# Altium PCB PBC-full.PcbDoc
Units mm, origin at the board's own origin, x right, y up, seen from the top; angles counter-clockwise.
Board outline 80.01 x 65.41 mm, 2 copper layers (Top Layer, Bottom Layer); 75 components, 86 nets, 316 pads, 108 vias.
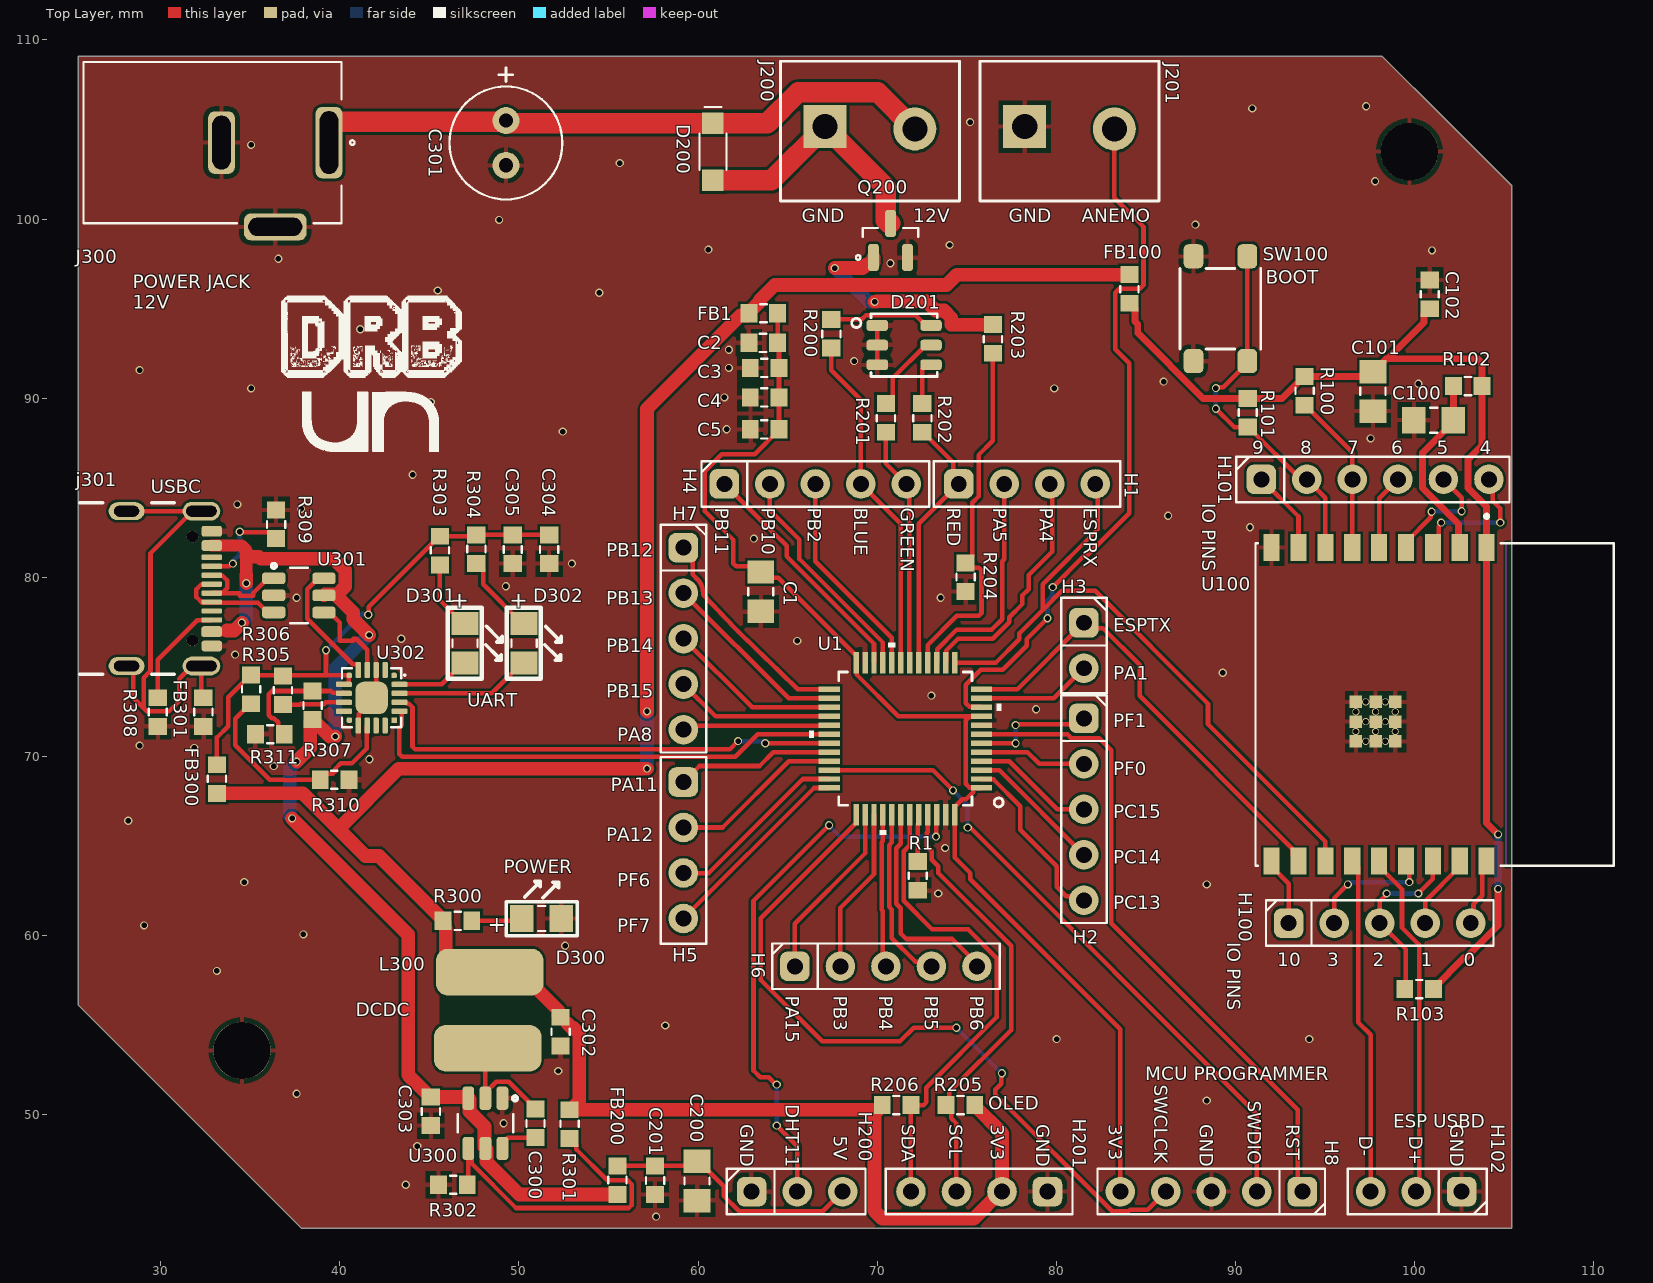
[diagram p0: Top Layer view]
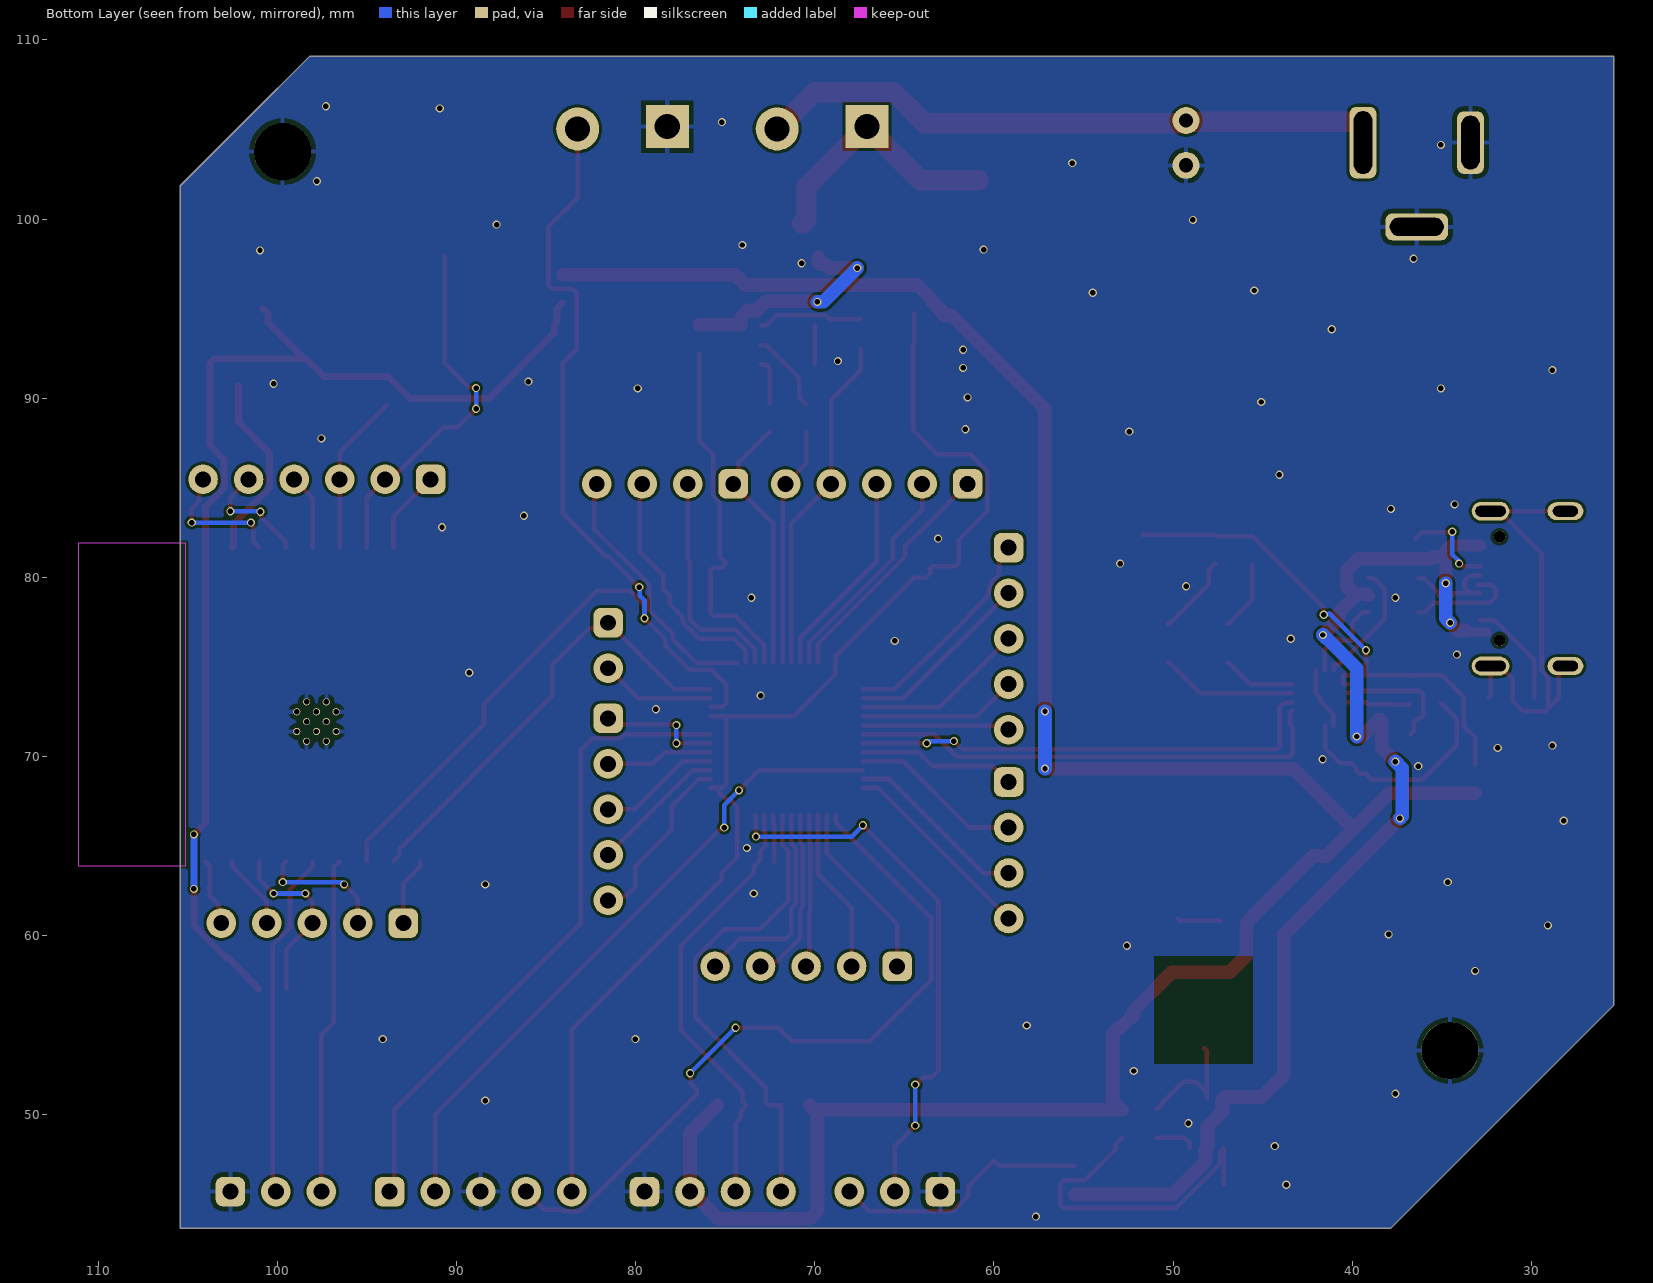
[diagram p1: Bottom Layer view, seen from below]
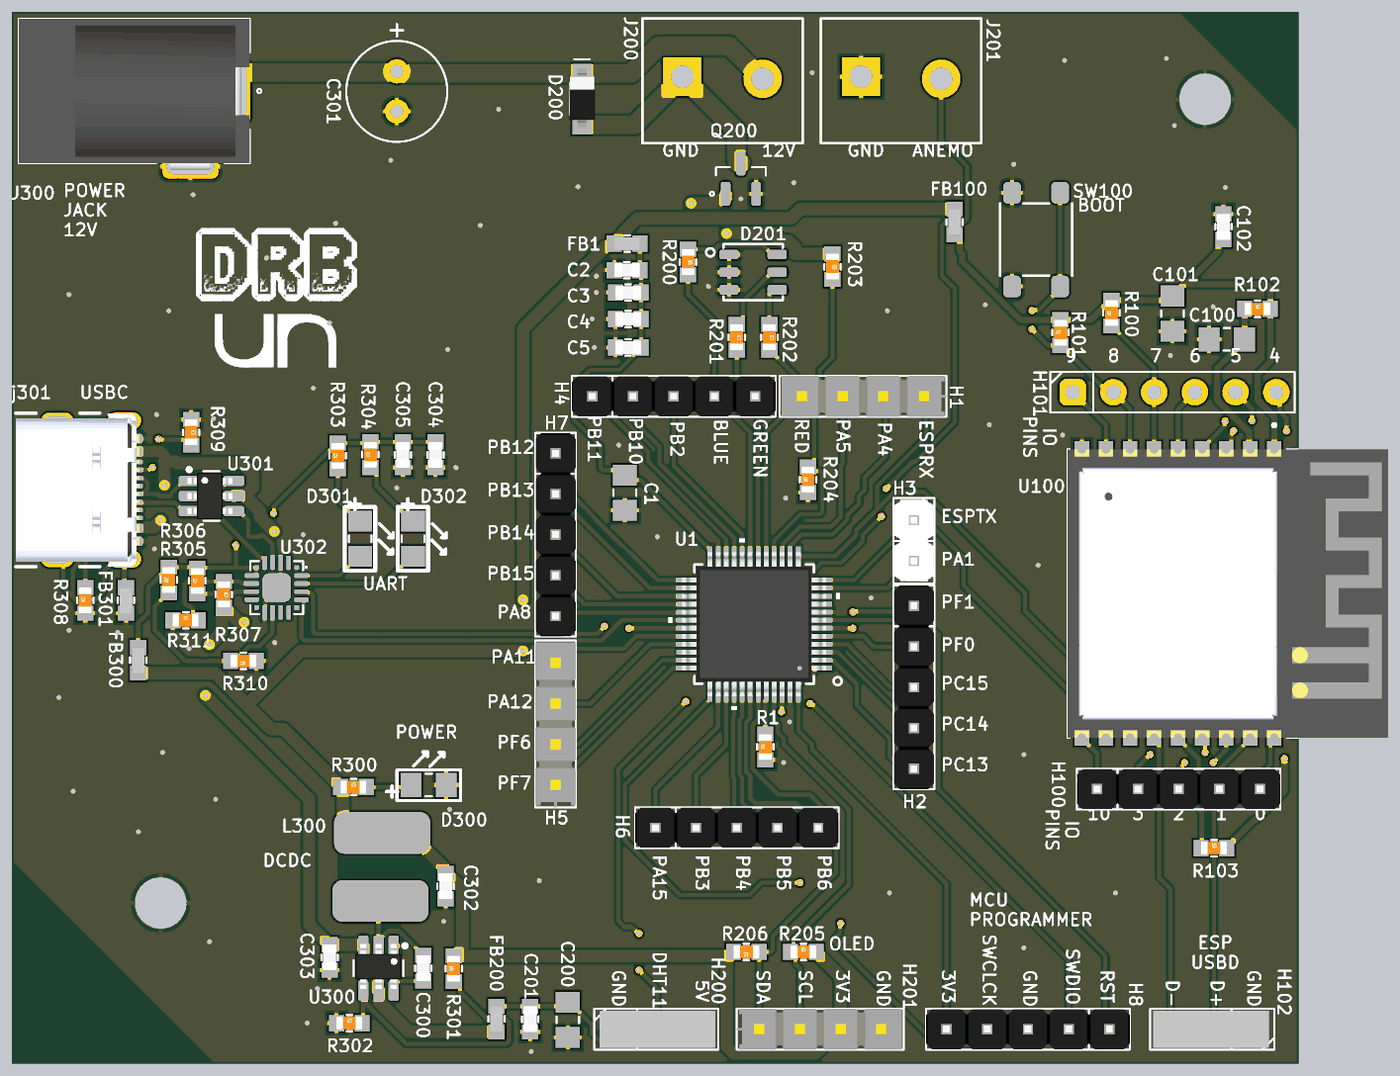
[diagram p2: 3D render of the assembled board from above, using the file's embedded part models]

## Layer stack, top to bottom
Top Solder: solder mask 0.0102, Solder Resist, Dk 3.5
Top Layer: signal copper 0.0356
Dielectric 1: dielectric 0.32, FR-4, Dk 4.8
Bottom Layer: signal copper 0.0356
Bottom Solder: solder mask 0.0102, Solder Resist, Dk 3.5

## Board outline
37.846,43.688 25.4,56.134 25.4,109.093 98.171,109.093 101.727,105.537 105.41,101.854 105.41,43.688

## Design rules (kind name [scope] priority, off if disabled: settings)
Clearance [All] p1: gap=0.152 ignorepadtopadclearanceinfootprint=FALSE
DiffPairsRouting DiffPairsRouting_USB [InDifferentialPairClass('USB_2.0_MCU') and InDifferentialPairClass('USB_2.0_ESP')] p1: maxlimit=0.152 minlimit=0.152 mostfreqgap=0.152 toplayer_minwidth=0.279 toplayer_maxwidth=0.787 toplayer_prefwidth=0.787 bottomlayer_minwidth=0.279 bottomlayer_maxwidth=0.787 bottomlayer_prefwidth=0.787 maxuncoupledlength=12.7
HoleSize [All] p1: absolutevalues=TRUE maxlimit=25.4 minlimit=0.254 maxpercent=80.000 minpercent=20.000
MatchedLengths [InDifferentialPairClass('USB_2.0_MCU') and InDifferentialPairClass('USB_2.0_ESP')] p1: tolerance=1.27 checknetsindiffpair=TRUE checkdiffpairvsdiffpair=FALSE checkxsignals=FALSE checkothers=FALSE
MinimumSolderMaskSliver [All] p1: minsoldermaskwidth=0.102
PolygonConnect PolygonConnect_via [IsVia] p1: connectstyle=Direct reliefconductorwidth=0.254 reliefentries=4 polygonreliefangle="90 Angle" airgapwidth=0.254
PolygonConnect [All] p2: connectstyle=Relief reliefconductorwidth=0.254 reliefentries=4 polygonreliefangle="90 Angle" airgapwidth=0.254
RoutingVias [All] p1: holewidth=0.305 width=0.457 viastyle="Through Hole" minholewidth=0.305 minwidth=0.457 maxholewidth=25.4 maxwidth=25.4
SilkToSilkClearance [All] p1: silktosilkclearance=0.025
SilkToSolderMaskClearance [IsPad] p1: minsilkscreentomaskgap=0.025 clearancetoexposedcopper=TRUE
SolderMaskExpansion [All] p1: expansion=0.102 istentingtop=FALSE
SupplyNets "Schematic Supply Nets_6" [InNet('3V3_ESP32')] p1: voltage=0.000
SupplyNets "Schematic Supply Nets_5" [InNet('3V3_CP')] p2: voltage=0.000
SupplyNets "Schematic Supply Nets_4" [InNet('VUSB')] p3: voltage=0.000
SupplyNets "Schematic Supply Nets_3" [InNet('3V3_MCU')] p4: voltage=0.000
SupplyNets "Schematic Supply Nets_2" [InNet('3V3')] p5: voltage=0.000
SupplyNets "Schematic Supply Nets_1" [InNet('GND')] p6: voltage=0.000
SupplyNets "Schematic Supply Nets" [InNet('12V')] p7: voltage=0.000
Width Width_2A [InNetClass('12V_2A')] p1: maxlimit=1.143 minlimit=0.254 preferedwidth=1.143
Width Width_1A [InNetClass('5V_1A')] p2: maxlimit=0.762 minlimit=0.254 preferedwidth=0.762
Width Width_3V3_1A [InNet('3V3')] p3: maxlimit=0.762 minlimit=0.254 preferedwidth=0.762
Width Width_0.5A [InNet('3V3_ESP32')] p4: maxlimit=0.508 minlimit=0.381 preferedwidth=0.508
Width [All] p5: maxlimit=1.524 minlimit=0.152 preferedwidth=0.254
25 further rules are at their usual default settings.

## Classes and differential pairs
component class 300: C300 C301 C302 C303 C304 C305 D300 D301 D302 FB300 FB301 J300 j301 L300 R300 R301 R302 R303 R304 R305 R306 R307 R308 R309 R310 R311 U300 U301 U302
component class 100: C100 C101 C102 FB100 H100 H101 H102 R100 R101 R102 R103 SW100 U100
component class 000: C1 C2 C3 C4 C5 FB1 H1 H2 H3 H4 H5 H6 H7 H8 R1 U1
differential pair class USB_2.0_MCU: DATA USB_D
differential pair class USB_2.0_ESP: ESP_USBD
net class 12V_2A: 12V NetD200_2
net class 5V_1A: 3V3 NetC300_1 NetC300_2 VUSB
component class 200: C200 C201 D200 D201 FB200 H200 H201 J200 J201 Q200 R200 R201 R202 R203 R204 R205 R206 SDA
differential pair USB_D: +USB_D_P -USB_D_N
differential pair ESP_USBD: +ESP_USBD_P -ESP_USBD_N
differential pair DATA: +DATA_P -DATA_N

## Components (designator, comment, footprint, x,y, rotation, side; value= is the part's Value field where it differs from the comment)
C1 "10uF 25V" 0805_cap 63.5,79.205 r270 top value=10uF
C2 "0.1uF 50V" 0603_cap 63.64,93.091 r180 top value=0.1uF
C3 "0.1uF 50V" 0603_cap 63.716,91.694 r180 top value=0.1uF
C4 "0.1uF 50V" 0603_cap 63.716,90.043 r180 top value=0.1uF
C5 "0.1uF 50V" 0603_cap 63.716,88.265 r180 top value=0.1uF
C100 "10uF 25V" 0805_cap 101.049,88.773 r180 top value=10uF
C101 "10uF 25V" 0805_cap 97.663,90.381 r270 top value=10uF
C102 "0.1uF 50V" 0603_cap 100.838,95.796 r90 top value=0.1uF
C200 "10uF 25V" 0805_cap 59.944,46.312 r270 top value=10uF
C201 "0.1uF 50V" 0603_cap 57.6,46.355 r270 top value=0.1uF
C300 "0.1uF 50V" 0603_cap 50.927,49.53 r270 top value=0.1uF
C301 "100uF 35V" CAP_TH_2.5MM_6.3*12MM 49.276,104.247 r270 top value=100uF
C302 "22uF 10V" 0603_cap 52.324,54.648 r270 top value=22uF
C303 "10uF 10V" 0603_cap 45.085,50.203 r270 top value=10uF
C304 "10uF 10V" 0603_cap 51.689,81.572 r270 top value=10uF
C305 "0.1uF 50V" 0603_cap 49.657,81.572 r270 top value=0.1uF
D200 "40V 1A" SOD_123 60.833,103.759 r270 top
D201 "RGB" RGB_NS_3.5X3.7 71.501,92.964 r0 top
D300 "2.9V" 0805_LED 51.265,60.96 r0 top
D301 "2.9V" 0805_LED 46.99,76.327 r270 top
D302 "2V" 0805_LED 50.292,76.327 r270 top
FB1 "60OHM 2A" 0603_fb 63.64,94.742 r0 top value="60 OHM"
FB100 "60OHM 2A" 0603_fb 84.074,96.101 r270 top value="60 OHM"
FB200 "60OHM 2A" 0603_fb 55.499,46.355 r90 top value="60 OHM"
FB300 "60OHM 2A" 0603_fb 33.147,68.745 r90 top value="60 OHM"
FB301 "60OHM 2A" 0603_fb 32.385,72.479 r90 top value="60 OHM"
H1 "4x1" H_4x1_TH_2.54mm 78.359,85.217 r0 top
H2 "5x1" H_5x1_TH_100mil 81.534,67.056 r270 top
H3 "2x1" H_2x1_TH_100mil 81.534,76.2 r270 top
H4 "5x1" H_5x1_TH_100mil 66.548,85.217 r0 top
H5 "4x1" H_4x1_TH_2.54mm 59.182,64.77 r270 top
H6 "5x1" H_5x1_TH_100mil 70.485,58.293 r0 top
H7 "5x1" H_5x1_TH_100mil 59.182,76.581 r270 top
H8 "5x1" H_5x1_TH_100mil 88.646,45.72 r180 top
H100 "5x1" H_5x1_TH_100mil 98.044,60.706 r0 top
H101 "6x1" H_6x1_TH_100mil 97.79,85.471 r0 top
H102 "3x1" H_3X1_TH_100mil 100.076,45.72 r180 top
H200 "3x1" H_3X1_TH_100mil 65.532,45.72 r0 top
H201 "4x1" H_4x1_TH_2.54mm 75.692,45.72 r180 top
J200 "Connector 2pos" CON_2x1_TH_5MM 69.596,104.902 r0 top
J201 "Connector 2pos" CON_2x1_TH_5MM 80.732,104.902 r0 top
J300 "PWR JACK 2.1mm" CON_POWER_BARREL_2.1MM_3CONN 36.401,104.267 r270 top
j301 "USB C" CON_USB_C_16P_RA 30.48,79.375 r270 top
L300 "2.2uH 4A" Ind_5.8*5.2_NS 48.313,55.846 r90 top value=2.2uH
Q200 "N CH" SOT_23_3 70.739,98.806 r90 top
R1 "10k 1/10W" 0603_res 72.263,63.335 r90 top value=10k
R100 "1k 1/10W" 0603_res 93.853,90.411 r90 top value=1k
R101 "1k 1/10W" 0603_res 90.678,89.192 r90 top value=1k
R102 "1k 1/10W" 0603_res 102.959,90.678 r0 top value=1k
R103 "1k 1/10W" 0603_res 100.241,57.023 r0 top value=1k
R200 "100R 1/10W" 0603_res 67.437,93.599 r270 top value=100R
R201 "100R 1/10W" 0603_res 70.485,88.9 r270 top value=100R
R202 "100R 1/10W" 0603_res 72.517,88.9 r270 top value=100R
R203 "10k 1/10W" 0603_res 76.454,93.307 r270 top value=10k
R204 "10k 1/10W" 0603_res 74.93,80.01 r90 top value=10k
R205 "10k 1/10W" 0603_res 74.638,50.546 r0 top value=10k
R206 "10k 1/10W" 0603_res 71.082,50.546 r180 top value=10k
R300 "84R5 1/10W" 0603_res 46.571,60.833 r0 top value=84R5
R301 "33k2 1/10W" 0603_res 52.832,49.492 r90 top value=33k2
R302 "10k 1/10W" 0603_res 46.317,46.101 r0 top value=10k
R303 "84R5 1/10W" 0603_res 45.593,81.496 r90 top value=84R5
R304 "150R 1/10W" 0603_res 47.625,81.572 r90 top value=150R
R305 "1k 1/10W" 0603_res 36.83,73.698 r90 top value=1k
R306 "10k 1/10W" 0603_res 35.052,73.749 r90 top value=10k
R307 "33k2 1/10W" 0603_res 38.481,72.86 r270 top value=33k2
R308 "4k7 1/10W" 0603_res 29.845,72.479 r90 top value=4k7
R309 "4k7 1/10W" 0603_res 36.449,82.969 r270 top value=4k7
R310 "10k 1/10W" 0603_res 39.713,68.707 r180 top value=10k
R311 "54k9 1/10W" 0603_res 36.106,71.247 r0 top value=54k9
SW100 "Sw" Sw_PUSH_4.5x4.5x5mm 89.154,94.996 r90 top
U1 "STM32F030C8T6TR" LQFP48_7x7mm 71.569,70.997 r180 top
U100 "ESP32-C3-WROOM-02-N4" ESP32-C3-WROOM-02-N4 98.013,72.911 r270 top
U300 "TPS564201DDCR" SOT_23_6 48.133,49.53 r270 top
U301 "USBLC6-2SC6" SOT_23_6 37.719,78.994 r0 top
U302 "CP2102N-A02-GQFN20R" WFQFN_20_EP_3X3MM 41.783,73.279 r270 top

## Footprints (in the part's own frame and the unit in brackets; to place one, negate y for a bottom-side part, rotate by r counter-clockwise, add the part's x,y. Pads: shape width x height; smd on the part's side, far side on the other; paste and mask are expansions set on the pad)
0603_cap [mil]
  rect 37x40 smd: 1(-31.5,0) 2(31.5,0)
  silkscreen extent -7,-20 8,20, body extent -31,-17 31,17, height 34
0603_fb [mil]
  rect 37x40 smd: 1(-31.5,0) 2(31.5,0)
  silkscreen extent -6,-20 8,20, body extent -32,-16 31,16, height 32
0603_res [mil] "1608 Metric / 20190225 / C-A.Serna.A"
  rect 37x40 smd: 1(-31.5,0) 2(31.5,0)
  silkscreen extent -7,-20 8,20, body extent -31,-16 32,16, height 12
0805_cap [mm]
  rect 1.3x1.5 smd: 1(-1.1,0) 2(1.1,0)
  silkscreen extent -0.2,-0.7 0.2,0.7, body extent -1.13,-0.7 1.07,0.7, height 1
0805_LED [mm]
  rect 1.3x1.5 smd: 1(-1.1,0) 2(1.1,0)
  silkscreen extent -1.98,-0.97 1.98,2.07, body extent -1,-0.62 1,0.63, height 1.1
CAP_TH_2.5MM_6.3*12MM [mm]
  round 1.5 hole 0.8: 1(-1.25,0) 2(1.25,0)
  silkscreen extent -4.19,-3.15 3.15,3.15, body extent -3.15,-3.15 3.15,3.15, height 12
CON_2x1_TH_5MM [mm]
  rect 2.4x2.4 hole 1.4: 1(-2.5,0.254)
  round 2.4 hole 1.4: 2(2.5,0.127)
  silkscreen extent -5,-3.9 5,3.9, body extent -5,-3.9 5,3.9, height 10.2
CON_POWER_BARREL_2.1MM_3CONN [mm]
  rrect50% 4x1.5 hole 1.016 slot 3.5 at 0 deg: 1(0,3)
  rrect50% 3.5x1.5 hole 1.016 slot 3 at 0 deg: 2(0,-3)
  rrect50% 1.5x3.5 hole 1.016 slot 3 at 90 deg: 3(4.7,0)
  silkscreen extent -4.5,-10.7 4.5,4.43, body extent -4.5,-10.7 4.9,3.7, height 11
CON_USB_C_16P_RA [mm]
  oval 1.05x2.1 hole 0.6 slot 1.7 at 90 deg: 0(-4.32,1.803) 0(4.32,1.803)
  oval 1x2 hole 0.6 slot 1.4 at 90 deg: 0(-4.32,-2.377) 0(4.32,-2.377)
  rrect50% 0.6x1.15 smd mask+0.046: A1/B12(-3.2,2.378) A4/B9(-2.4,2.378) B1/A12(3.2,2.378) B4/A9(2.4,2.378)
  rrect50% 0.3x1.15 smd mask+0.046: A5(-1.25,2.378) A6(-0.25,2.378) A7(0.25,2.378) A8(1.25,2.378) B5(1.75,2.378) B6(0.75,2.378) B7(-0.75,2.378) B8(-1.75,2.378)
  round 0.65 hole 0.65 unplated mask+0.046: ""(-2.89,1.303) ""(2.89,1.303)
  silkscreen extent -4.79,-4.98 4.79,0.27, body extent -4.79,-4.98 4.79,2.73, height 3.31
ESP32-C3-WROOM-02-N4 [mm]
  rect 1.5x0.9 smd: 1(-8.75,6) 2(-8.75,4.5) 3(-8.75,3) 4(-8.75,1.5) 5(-8.75,0) 6(-8.75,-1.5) 7(-8.75,-3) 8(-8.75,-4.5) 9(-8.75,-6) 10(8.75,-6) 11(8.75,-4.5) 12(8.75,-3) 13(8.75,-1.5) 14(8.75,0) 15(8.75,1.5) 16(8.75,3) 17(8.75,4.5) 18(8.75,6)
  rect 0.7x0.7 smd: 19(-0.14,0.9) 19(-0.14,-0.2) 19(-0.14,-1.3) 19(0.96,0.9) 19(0.96,-0.2) 19(0.96,-1.3) 19(2.06,-0.2) 19(2.06,0.9) 19(2.06,-1.3)
  round 0.4 hole 0.3 mask+0: 19(-0.14,0.35) 19(-0.14,-0.75) 19(0.41,0.9) 19(0.41,-0.2) 19(0.41,-1.3) 19(0.96,0.35) 19(0.96,-0.75) 19(1.51,0.9) 19(1.51,-0.2) 19(1.51,-1.3) 19(2.06,-0.75) 19(2.06,0.35)
  Keep-Out Layer region: 9,7.1 -9,7.1 -9,13.1 9,13.1
  Keep-Out Layer region: 9,7.1 -9,7.1 -9,13.1 9,13.1
  silkscreen extent -10.6,-6.9 9,13.1, body extent -9,-6.9 9,13.1, height 3.35
H_2x1_TH_100mil [mil]
  rrect50% 65x65 hole 35: 1(-50,0)
  round 65 hole 35: 2(50,0)
  silkscreen extent -105,-50 105,50, body extent -101,-49 99,49, height 339
H_3X1_TH_100mil [mil]
  rrect50% 65x65 hole 35: 1(-100,0)
  round 65 hole 35: 2(0,0) 3(100,0)
  silkscreen extent -155,-50 150,50, body extent -142,-46 142,46, height 320
H_4x1_TH_2.54mm [mil]
  rrect50% 65x65 hole 35: 1(-150,0)
  round 65 hole 35: 2(-50,0) 3(50,0) 4(150,0)
  silkscreen extent -205,-50 205,50, body extent -200,-50 205,50, height 420
H_5x1_TH_100mil [mil]
  rrect50% 65x65 hole 35: 1(-200,0)
  round 65 hole 35: 2(-100,0) 3(0,0) 4(100,0) 5(200,0)
  silkscreen extent -250,-50 250,50, body extent -250,-49 250,49, height 335
H_6x1_TH_100mil [mil]
  rrect50% 65x65 hole 35: 1(-250,0)
  round 65 hole 35: 2(-150,0) 3(-50,0) 4(50,0) 5(150,0) 6(250,0)
  silkscreen extent -305,-50 295,50
Ind_5.8*5.2_NS [mm]
  rrect50% 2.6x6 smd: 1(-2.125,0.053) 2(2.125,-0.053)
  body extent -3,-2.75 3,2.75, height 4.5
LQFP48_7x7mm [mm]
  rect 1.194x0.305 smd paste+0 mask+0.046: 1(-4.25,2.75) 2(-4.25,2.25) 3(-4.25,1.75) 4(-4.25,1.25) 5(-4.25,0.75) 6(-4.25,0.25) 7(-4.25,-0.25) 8(-4.25,-0.75) 9(-4.25,-1.25) 10(-4.25,-1.75) 11(-4.25,-2.25) 12(-4.25,-2.75) 25(4.25,-2.75) 26(4.25,-2.25) 27(4.25,-1.75) 28(4.25,-1.25) 29(4.25,-0.75) 30(4.25,-0.25) 31(4.25,0.25) 32(4.25,0.75) 33(4.25,1.25) 34(4.25,1.75) 35(4.25,2.25) 36(4.25,2.75)
  rect 0.305x1.194 smd paste+0 mask+0.046: 13(-2.75,-4.25) 14(-2.25,-4.25) 15(-1.75,-4.25) 16(-1.25,-4.25) 17(-0.75,-4.25) 18(-0.25,-4.25) 19(0.25,-4.25) 20(0.75,-4.25) 21(1.25,-4.25) 22(1.75,-4.25) 23(2.25,-4.25) 24(2.75,-4.25) 37(2.75,4.25) 38(2.25,4.25) 39(1.75,4.25) 40(1.25,4.25) 41(0.75,4.25) 42(0.25,4.25) 43(-0.25,4.25) 44(-0.75,4.25) 45(-1.25,4.25) 46(-1.75,4.25) 47(-2.25,4.25) 48(-2.75,4.25)
  silkscreen extent -5.46,-5.35 5.35,5.35, body extent -4.5,-4.5 4.5,4.5, height 1.6
RGB_NS_3.5X3.7 [mm]
  rrect50% 1.2x0.6 smd: 1(-1.5,1.1) 2(-1.5,0) 3(-1.5,-1.1) 4(1.5,-1.1) 5(1.5,0) 6(1.5,1.1)
  silkscreen extent -2.92,-1.75 1.85,1.75, body extent -1.85,-1.74 1.85,1.75, height 1
SOD_123 [mm]
  rect 1.2x1.2 smd: 1(-1.6,0) 2(1.6,0)
  silkscreen extent -2.5,-0.75 1,0.75, body extent -1.93,-0.8 1.77,0.8, height 1.28
SOT_23_3 [mm]
  rrect50% 1.5x0.6 smd: 1(-0.95,0.95) 2(-0.95,-0.95) 3(0.95,0)
  silkscreen extent -1.07,-1.55 0.7,1.92, body extent -0.7,-1.52 0.7,1.53, height 1.12
SOT_23_6 [mm]
  rrect50% 1.3x0.65 smd mask+0.064: 1(-1.4,0.95) 2(-1.4,0) 3(-1.4,-0.95) 4(1.4,-0.95) 5(1.4,0) 6(1.4,0.95)
  silkscreen extent -1.52,-1.55 0.5,1.78, body extent -1.5,-1.45 1.3,1.45, height 1.45
Sw_PUSH_4.5x4.5x5mm [mm]
  rrect50% 1.35x1.1 smd: 1(-2.925,1.5) 1(2.925,1.5) 2(-2.925,-1.5) 2(2.925,-1.5)
  silkscreen extent -2.25,-2.25 2.25,2.25, body extent -2.25,-2.25 2.25,2.25, height 5
WFQFN_20_EP_3X3MM [mm]
  rrect50% 0.3x0.3 smd mask+0.046: 1(-1.25,1.25) 6(-1.25,-1.25) 11(1.25,-1.25)
  rrect50% 0.9x0.3 smd mask+0.046: 2(-1.55,0.75) 3(-1.55,0.25) 4(-1.55,-0.25) 5(-1.55,-0.75) 12(1.55,-0.75) 13(1.55,-0.25) 14(1.55,0.25) 15(1.55,0.75)
  rrect50% 0.3x0.9 smd mask+0.046: 7(-0.75,-1.55) 8(-0.25,-1.55) 9(0.25,-1.55) 10(0.75,-1.55) 17(0.75,1.55) 18(0.25,1.55) 19(-0.25,1.55) 20(-0.75,1.55)
  rect 0.3x0.3 smd mask+0.046: 16(1.25,1.25)
  rrect50% 1.8x1.8 smd mask+0.046: 21(0,0)
  silkscreen extent -1.65,-1.65 1.65,1.9, body extent -1.5,-1.5 1.5,1.5, height 0.8

## Part data
C1 C100 C101 C200: library part Cap_10uF_0805_25V_, "25V 10uF X5R ±10% 0805 Multilayer Ceramic Capacitors MLCC - SMD/SMT ROHS", Manufacturer="Samsung Electro-Mechanics", Manufacturer Part Number=CL21A106KAYNNNE, Supplier Part Number 1=C15850, ComponentLink1Description=LCSC, ComponentLink1URL=https://lcsc.com/product-detail/Multilayer-Ceramic-Capacitors-MLCC-SMD-SMT_Samsung-Electro-Mechanics-CL21A106KAYNNNE_C15850.html, Supplier 1=LCSC
C2 C3 C4 C5 C102 C201 C300 C305: library part Cap_0.1uF_0603_50V, "50V 100nF Y5V -20%~+80% 0603 Multilayer Ceramic Capacitors MLCC - SMD/SMT ROHS", Manufacturer="Walsin Tech Corp", Manufacturer Part Number=0603F104Z500CT, Supplier Part Number 1=C83060, ComponentLink1Description=LCSC, ComponentLink1URL=https://www.lcsc.com/product-detail/Multilayer-Ceramic-Capacitors-MLCC-SMD-SMT_Walsin-Tech-Corp-0603F104Z500CT_C83060.html, Supplier 1=LCSC
C301: library part Cap_100uF_ALU_TH_35V, "100uF 35V ±20% Plugin,D6.3xL12mm Aluminum Electrolytic Capacitors - Leaded ROHS", Manufacturer=HRK, Manufacturer Part Number="35V100uF CD110", Supplier Part Number 1=C2960381, ComponentLink1Description=LCSC, ComponentLink1URL=https://lcsc.com/product-detail/Aluminum-Electrolytic-Capacitors-Leaded_HRK-35V100uF-CD110_C2960381.html, Supplier 1=LCSC
C302: library part Cap_22uF_0603_10V, "10V 22uF X5R ±20% 0603 Multilayer Ceramic Capacitors MLCC - SMD/SMT ROHS", Manufacturer=HRE, Manufacturer Part Number=CGA0603X5R226M100JT, Supplier Part Number 1=C6119863, ComponentLink1Description=LCSC, ComponentLink1URL=https://lcsc.com/product-detail/Multilayer-Ceramic-Capacitors-MLCC-SMD-SMT_HRE-CGA0603X5R226M100JT_C6119863.html, Supplier 1=LCSC
C303 C304: library part Cap_10uF_0603_10V, "10V 10uF X5R ±10% 0603 Multilayer Ceramic Capacitors MLCC - SMD/SMT ROHS", Manufacturer=CCTC, Manufacturer Part Number=TCC0603X5R106K100CT, Supplier Part Number 1=C380314, ComponentLink1Description=LCSC, ComponentLink1URL=https://www.lcsc.com/product-detail/Multilayer-Ceramic-Capacitors-MLCC-SMD-SMT_CCTC-TCC0603X5R106K100CT_C380314.html, Supplier 1=LCSC
D200: library part D_Schottky_40V_1A_SOD_123F, "DIODE SCHOTTKY 40V 1A SOD123F", Manufacturer="Shanghai Prisemi Elec", Manufacturer Part Number=PSBD1DF40V1H, Supplier Part Number 1=C110730, ComponentLink1Description=LCSC, ComponentLink1URL=https://www.lcsc.com/product-detail/Switching-Diode_Shanghai-Prisemi-Elec-PSBD1DF40V1H_C110730.html, Supplier 1=LCSC
D201: library part LED_RGB_3535_SMD, "-30℃~+85℃ RGB 110° 3535(mm) Light Emitting Diodes (LED) ROHS", Manufacturer="Foshan NationStar Optoelectronics", Manufacturer Part Number=RS-3535MWAM, Supplier Part Number 1=C842778, ComponentLink1Description=LCSC, ComponentLink1URL=https://www.lcsc.com/product-detail/Light-Emitting-Diodes-LED_Foshan-NationStar-Optoelectronics-RS-3535MWAM_C842778.html, Supplier 1=LCSC
D300 D301: library part LED_0805_Green, "LED GREEN CLEAR 0805 SMD", Manufacturer=XINGLIGHT, Manufacturer Part Number=XL-2012UGC, Supplier Part Number 1=C965815, ComponentLink1Description=LCSC, ComponentLink1URL=https://www.lcsc.com/product-detail/Light-Emitting-Diodes-LED_XINGLIGHT-XL-2012UGC_C965815.html, Supplier 1=LCSC
D302: library part LED_0805_RED, "LED RED CLEAR 0805 SMD", Manufacturer=XINGLIGHT, Manufacturer Part Number=XL-2012SURC, Supplier Part Number 1=C965812, ComponentLink1Description=LCSC, ComponentLink1URL=https://www.lcsc.com/product-detail/Light-Emitting-Diodes-LED_XINGLIGHT-XL-2012SURC_C965812.html, Supplier 1=LCSC
FB1 FB100 FB200 FB300 FB301: library part FB_60_0603_2A, "2A 1 100mΩ 60Ω@100MHz ±25% 0603 Ferrite Beads ROHS", Manufacturer=TAI-TECH, Manufacturer Part Number=HCB1608KF-600T20, Supplier Part Number 1=C369516, ComponentLink1Description=LCSC, ComponentLink1URL=https://www.lcsc.com/product-detail/Ferrite-Beads_TAI-TECH-HCB1608KF-600T20_C369516.html, Supplier 1=LCSC
H1 H5 H201: library part H_Male_4x1_TH_100mil, "H_Male_4x1_TH_100mil", ComponentLink1Description=LCSC
H2 H4 H6 H7 H8 H100: library part H_Male_5x1_TH_100mil, "H_Male_5x1_TH_100mil", ComponentLink1Description=LCSC
H3: library part H_Male_2x1_TH_100mil, "H_Male_2x1_TH_100mil", ComponentLink1Description=LCSC
H101: library part H_Male_6x1_TH_100mil, "H_Male_6x1_TH_100mil", ComponentLink1Description=LCSC
H102 H200: library part H_Male_3x1_TH_100mil, "H_Male_3x1_TH_100mil", ComponentLink1Description=LCSC
J200 J201: library part Con_2x1_TH_5mm, "2POS 5MM", Manufacturer=JILN, Manufacturer Part Number=JL126-50002G01, Supplier Part Number 1=C394556, ComponentLink1Description=Digi-Key, ComponentLink1URL=https://www.lcsc.com/product-detail/Screw-terminal_JILN-JL126-50002G01_C394556.html, Supplier 1=LCSC
J300: library part Con_Power_Jack_2.1mm_3pins, "CONN PWR JACK 2X5.5MM SOLDER", Manufacturer=HCTL, Manufacturer Part Number=HC-DC-005-2.0T, Supplier Part Number 1=C3010533, ComponentLink1Description=LCSC, ComponentLink1URL=https://www.lcsc.com/product-detail/AC-DC-Power-Connectors_HCTL-HC-DC-005-2-0T_C3010533.html, Supplier 1=LCSC
j301: library part CON_USB_TYPEC_16P, "3A USB 3.1 1 Surface Mount 16P Female -40℃~+85℃ Type-C SMD USB Connectors ROHS", Manufacturer="SHOU HAN", Manufacturer Part Number=TYPE-C-3.1-16PIN, Supplier Part Number 1=C7507405, ComponentLink1Description=LCSC, ComponentLink1URL=https://lcsc.com/product-detail/USB-Connectors_SHOU-HAN-TYPE-C-3-1-16PIN_C7507405.html, Supplier 1=LCSC
L300: library part Inductor_2.2uH_4A_5.8*5.2mm, "4A 2.2uH ±20% 22.1mΩ SMD,5.8x5.2mm Inductors (SMD) ROHS", Manufacturer="SHOU HAN", Manufacturer Part Number=CY54-2.2UH, Supplier Part Number 1=C2929427, ComponentLink1Description=LCSC, ComponentLink1URL=https://lcsc.com/product-detail/Inductors-SMD_SHOU-HAN-CY54-2-2UH_C2929427.html, Supplier 1=LCSC
Q200: library part Q_NFET_20V_3.2A_SOT23, "MOSFET N-CH 20V SOT23", Manufacturer=Doeshare, Manufacturer Part Number=DN2302S, Supplier Part Number 1=C2931750, ComponentLink1Description=LCSC, ComponentLink1URL=https://www.lcsc.com/product-detail/MOSFETs_Doeshare-DN2302S_C2931750.html, Supplier 1=LCSC
R1 R203 R204 R205 R206 R302 R306 R310: library part Res_10k_0603_1/10W, "RES SMD 10k OHM 5% 1/10W 0603", Manufacturer=FOJAN, Manufacturer Part Number=FRC0603J103TS, Supplier Part Number 1=C2930027, ComponentLink1Description=LCSC, ComponentLink1URL=https://www.lcsc.com/product-detail/Chip-Resistor-Surface-Mount_FOJAN-FRC0603J103TS_C2930027.html, Supplier 1=LCSC
  R205 R206 R306 R310: Usage=NM
R100 R101 R102 R103 R305: library part Res_1k_0603_1/10W, "RES SMD 1k OHM 5% 1/10W 0603", Manufacturer=FOJAN, Manufacturer Part Number="FRC0603J102 TS", Supplier Part Number 1=C2907113, ComponentLink1Description=LCSC, ComponentLink1URL=https://www.lcsc.com/product-detail/Chip-Resistor-Surface-Mount_FOJAN-FRC0603J102-TS_C2907113.html, Supplier 1=LCSC
R200 R201 R202: library part Res_100R_0603_1/10W, "RES SMD 100R OHM 5% 1/10W 0603", Manufacturer=FOJAN, Manufacturer Part Number="FRC0603J101 TS", Supplier Part Number 1=C2907089, ComponentLink1Description=LCSC, ComponentLink1URL=https://www.lcsc.com/product-detail/Chip-Resistor-Surface-Mount_FOJAN-FRC0603J101-TS_C2907089.html, Supplier 1=LCSC
R300 R303: library part Res_84R5_0603_1/10W, "100mW Thick Film Resistor 50V ±100ppm/℃ ±1% 84.5Ω 0603 Chip Resistor - Surface Mount ROHS", Manufacturer="LIZ Elec", Manufacturer Part Number=CR0603FA84R5G, Supplier Part Number 1=C101216, ComponentLink1Description=LCSC, ComponentLink1URL=https://lcsc.com/product-detail/Chip-Resistor-Surface-Mount_LIZ-Elec-CR0603FA84R5G_C101216.html, Supplier 1=LCSC
R301 R307: library part Res_33k2_0603_1/10W, "100mW Thick Film Resistor 75V ±100ppm/℃ ±1% 33.2kΩ 0603 Chip Resistor - Surface Mount ROHS", Manufacturer=YAGEO, Manufacturer Part Number=RC0603FR-0733K2L, Supplier Part Number 1=C185338, ComponentLink1Description=LCSC, ComponentLink1URL=https://lcsc.com/product-detail/Chip-Resistor-Surface-Mount_YAGEO-RC0603FR-0733K2L_C185338.html, Supplier 1=LCSC
R304: library part Res_150R_0603_1/10W, "100mW Thick Film Resistor 75V ±100ppm/℃ ±1% 150Ω 0603 Chip Resistor - Surface Mount ROHS", Manufacturer=RALEC, Manufacturer Part Number=RTT031500FTP, Supplier Part Number 1=C103302, ComponentLink1Description=LCSC, ComponentLink1URL=https://lcsc.com/product-detail/Chip-Resistor-Surface-Mount_RALEC-RTT031500FTP_C103302.html, Supplier 1=LCSC
R308 R309: library part Res_4k7_0603_1/10W, "100mW Thick Film Resistor 75V ±1% 4.7kΩ 0603 Chip Resistor - Surface Mount ROHS", Manufacturer=VO, Manufacturer Part Number=SCR0603F4K7, Supplier Part Number 1=C3016318, ComponentLink1Description=LCSC, ComponentLink1URL=https://lcsc.com/product-detail/Chip-Resistor-Surface-Mount_VO-SCR0603F4K7_C3016318.html, Supplier 1=LCSC
R311: library part Res_54k9_0603_1/10W, "100mW Thick Film Resistor 75V ±100ppm/℃ ±1% 54.9kΩ 0603 Chip Resistor - Surface Mount ROHS", Manufacturer=YAGEO, Manufacturer Part Number=RC0603FR-0754K9L, Supplier Part Number 1=C185321, ComponentLink1Description=LCSC, ComponentLink1URL=https://lcsc.com/product-detail/Chip-Resistor-Surface-Mount_YAGEO-RC0603FR-0754K9L_C185321.html, Supplier 1=LCSC
SW100: library part Sw_PUSH_4.5x4.5x5.0xmm, "SWITCH TACTILE SPST-NO 0.05A 12V", Manufacturer=BZCN, Manufacturer Part Number=TSC015A05026A, Supplier Part Number 1=C2888509, ComponentLink1Description=LCSC, ComponentLink1URL=https://www.lcsc.com/product-detail/Tactile-Switches_BZCN-TSC015A05026A_C2888509.html, Last modified by=N-A.Potosi, Last modified date=20190222, Supplier 1=LCSC
U1: library part IC_STM32F030C8T6TR_LQFP48_7x7MM, "IC MCU 32BIT 64KB FLASH 48LQFP", Manufacturer=STMicroelectronics, Supplier Part Number 1=C23922, ComponentLink1Description=LCSC, ComponentLink1URL=https://www.lcsc.com/product-detail/ST-Microelectronics_STMicroelectronics-STM32F030C8T6_C23922.html, Manufacturer Part Number=STM32F030C8T6TR, Supplier 1=LCSC
U100: library part MCU_ESP32-C3-WROOM-02-N4, "RF TXRX MOD BT WIFI PCB TH SMD", Manufacturer="Espressif Systems", Supplier Part Number 1=C2934560, ComponentLink1Description=LCSC, ComponentLink1URL=https://lcsc.com/product-detail/WiFi-Modules_Espressif-Systems-ESP32-C3-WROOM-02-N4_C2934560.html, Manufacturer Part Number=ESP32-C3-WROOM-02-N4, Supplier 1=LCSC
U300: library part DCDC_SW_BUCK_4A_SOT23-6, "IC REG BUCK ADJ 4A SOT23", Manufacturer="Texas Instruments", Supplier Part Number 1=C464812, ComponentLink1Description=LCSC, ComponentLink1URL=https://lcsc.com/product-detail/DC-DC-Converters_Texas-Instruments-TPS564201DDCR_C464812.html, Manufacturer Part Number=TPS564201DDCR, Supplier 1=LCSC
U301: library part TVS_5.25V_2CH_SOT_23_6, "TVS DIODE 5.25V 17V SOT23-6", Manufacturer=STMicroelectronics, Supplier Part Number 1=C7519, ComponentLink1Description=LCSC, ComponentLink1URL=https://www.lcsc.com/product-detail/ESD-Protection-Devices_STMicroelectronics-USBLC6-2SC6_C7519.html, Manufacturer Part Number=USBLC6-2SC6, Supplier 1=LCSC
U302: library part IC_SGL_USB2UART-BRIDGE_20QFN, "IC USB TO UART BRIDGE QFN20", Manufacturer="Silicon Labs", Supplier Part Number 1=C969913, ComponentLink1Description=LCSC, ComponentLink1URL=https://www.lcsc.com/product-detail/USB-ICs_SILICON-LABS-CP2102N-A02-GQFN20R_C969913.html, Manufacturer Part Number=CP2102N-A02-GQFN20R, Supplier 1=LCSC

## Free pads (board coordinates)
  round 3.2 hole 3.2 mask+0: 1(34.544,53.594) 1(99.695,103.759)

## Via types
v1: diameter 0.457, hole 0.305, Top Layer to Bottom Layer, tented both sides, 68 vias
v2: diameter 0.457, hole 0.305, Top Layer to Bottom Layer, 40 vias

## Nets (pads, with @x,y where several pads share a name; then routed paths per layer and width w, separated by ;. In a path a pad name is that pad's centre, name@x,y a point inside that pad or via, vN(x,y) a via of type N, cw(c..) or ccw(c..) an arc to the next point about the centre after c; other vN are vias at no path point)
3V3: C302.1 FB1.1 FB100.1 FB300.1 H201.2 L300.2 R205.2 R206.2 R300.1 R301.2 | length 137.3
  Top Layer w0.762: FB300.1 37.943,67.945 39.926,65.961 ; C302.1 52.286,55.448 52.197,55.537 52.197,55.841 50.067,57.971 L300.2 46.822,57.971 45.924,58.87 45.924,60.414 45.86,60.478 45.86,60.744 R300.1 45.771,60.871 42.189,64.453 41.435,64.453 39.926,65.961 ; C302.1@52.362,55.448 52.959,54.851 53.053,54.851 53.365,54.539 53.365,50.787 R301.2@52.87,50.292 ; R301.2 R301.2@52.87,50.292 ; v2(57.15,69.329) 43.294,69.329 39.926,65.961 ; v2(57.15,72.517) 57.15,89.408 62.357,94.615 62.751,94.615 62.84,94.704 FB1.1 ; FB1.1@62.84,94.78 63.436,95.377 63.436,95.471 64.284,96.319 73.869,96.319 74.451,96.901 FB100.1 ; R205.2 75.438,50.508 76.962,48.984 H201.2 76.896,45.72 75.372,44.196 70.296,44.196 69.85,44.642 69.85,50.076 R206.2@70.282,50.508 ; R301.2@52.87,50.292 70.066,50.292 R206.2@70.282,50.508 ; R206.2@70.282,50.508 R206.2 R206.2@70.282,50.508
  Bottom Layer w0.762: v2(57.15,69.329) v2(57.15,72.517)
3V3_CP: C304.1 C305.1 FB300.2 R303.2 R304.2 R305.2 R306.2 U302.6 U302.7 | length 29
  Top Layer w0.254: FB300.2 33.147,71.068 33.769,71.69 33.769,73.304 35.014,74.549 R306.2 36.779,74.549 R305.2 36.861,74.529 39.116,74.529 ; v2(39.233,75.936) 39.233,74.646 39.116,74.529 ; U302.7 40.487,74.029 40.51,74.052 40.51,74.506 U302.6 39.116,74.529 ; v2(41.589,77.911) 41.628,77.95 41.628,78.369 45.555,82.296 R303.2 47.549,82.296 R304.2 C305.1 C304.1
  Bottom Layer w0.254: v2(39.233,75.936) 41.293,77.996 41.339,77.95 41.55,77.95 v2(41.589,77.911)
3V3_ESP32: C101.1 C102.1 FB100.2 R100.2 R101.2 R102.2 R103.2 U100.1 | length 64.9
  Top Layer w0.381: FB100.2 84.112,95.301 84.391,95.021 84.391,94.275 84.544,94.122 84.544,93.632 88.184,89.992 R101.2 92.596,89.992 93.815,91.211 R100.2 97.393,91.211 C101.1 98.384,92.202 98.484,92.202 ; C102.1 100.8,94.996 100.52,94.717 100.52,94.239 98.484,92.202 ; R103.2 101.041,57.061 102.761,58.781 102.852,58.781 104.648,60.578 v2(104.648,62.611) ; v2(104.648,65.659) 104.013,66.294 U100.1 104.013,83.946 102.972,84.987 102.972,86.589 103.759,87.376 R102.2 103.759,91.979 103.536,92.202 98.484,92.202
  Bottom Layer w0.381: v2(104.648,62.611) v2(104.648,65.659)
3V3_MCU: C1.1 C2.1 C3.1 C4.1 C5.1 FB1.2 H8.5 U1.1 U1.9 U1.24 U1.48 | length 67.6
  Top Layer w0.254: C1.1 63.817,79.988 64.482,79.988 68.753,75.717 68.794,75.717 68.819,75.691 U1.24 68.844,75.222 68.844,74.577 71.175,72.247 75.106,72.247 U1.9 ; C1.1@63.596,80.47 63.449,80.617 62.125,80.617 61.976,80.766 61.976,82.09 60.363,83.703 60.363,85.916 61.315,86.868 63.157,86.868 64.516,88.227 C5.1 C4.1 C3.1 64.516,93.015 C2.1 FB1.2 ; 75.106,72.179 74.943,72.015 74.943,68.479 75.149,68.272 75.349,68.272 75.794,68.272 U1.1 75.374,68.247 75.349,68.222 75.349,68.006 74.955,67.611 74.739,67.611 74.319,67.192 74.319,64.365 75.184,63.5 75.184,63.162 83.566,54.78 H8.5
12V: C301.1 D200.1 J200.2 J300.1 | length 35.4
  Top Layer w1.143: J300.1 39.401,105.25 39.579,105.429 49.208,105.429 C301.1 49.373,105.497 49.511,105.359 D200.1 63.875,105.359 65.596,107.08 70.025,107.08 72.076,105.029 J200.2
ADC_ANEMO: J201.2 U1.10 | length 39.9
  Top Layer w0.254: U1.10 75.794,72.772 75.149,72.772 74.943,72.979 74.943,74.015 75.768,74.841 77,74.841 78.338,76.179 78.338,76.56 v2(79.502,77.724) ; v2(79.8,79.458) 81.484,81.143 81.628,81.143 84.074,83.589 84.074,91.948 83.287,92.735 83.287,95.886 83.501,96.101 84.647,96.101 84.861,96.315 84.861,99.567 83.232,101.197 J201.2
  Bottom Layer w0.254: v2(79.502,77.724) 79.502,78.722 79.761,78.981 79.761,79.42 v2(79.8,79.458)
DATA_N: U301.6 U302.5 | length 7
  Top Layer w0.254: U301.6 38.794,79.944 38.19,79.34 38.19,77.698 40.736,75.152 41.01,75.152 41.033,75.129 U302.5
DATA_P: U301.4 U302.4 | length 5.2
  Top Layer w0.254: U301.4 39.444,78.044 40.008,77.48 40.008,76.455 40.77,76.455 40.77,76.569 40.919,76.569 41.529,75.959 41.533,75.955 U302.4
DHT11_PIN: H200.2 U1.46 | length 31
  Top Layer w0.254: v2(64.389,49.403) 65.532,48.26 H200.2 ; v2(64.389,51.689) 64.353,51.689 63.94,52.102 63.468,52.102 63.094,52.476 63.094,61.951 v2(67.31,66.167) ; v2(73.279,65.532) 73.299,65.552 73.299,66.727 U1.46
  Bottom Layer w0.254: v2(64.389,49.403) v2(64.389,51.689) ; v2(67.31,66.167) 67.945,65.532 v2(73.279,65.532)
ESP_EN: C100.1 R102.1 U100.2 | length 10.6
  Top Layer w0.381: R102.1 102.159,88.783 C100.1 102.149,88.673 100.432,86.956 100.432,84.987 102.436,82.983 102.436,81.738 U100.2
ESP_IO0: H100.5 U100.18 | length 3.8
  Top Layer w0.254: H100.5 103.279,60.861 103.279,61.75 103.759,62.23 103.759,63.907 U100.18
ESP_IO1: H100.4 U100.17 | length 4.3
  Top Layer w0.254: H100.4 100.584,61.932 102.513,63.861 U100.17
ESP_IO2: H100.3 R103.1 U100.16 | length 10
  Top Layer w0.254: v2(98.425,62.357) 98.425,62.302 98.044,61.921 H100.3 99.492,59.258 99.492,57.074 R103.1 ; v2(100.203,62.357) 101.013,63.167 U100.16
  Bottom Layer w0.254: v2(98.425,62.357) v2(100.203,62.357)
ESP_IO3: H100.2 U100.15 | length 7.2
  Top Layer w0.254: H100.2 95.504,62.103 v2(96.266,62.865) ; U100.15 99.695,63.979 v2(99.695,62.992)
  Bottom Layer w0.254: v2(96.266,62.865) 96.393,62.992 v2(99.695,62.992)
ESP_IO4: H101.6 U100.3 | length 7.6
  Top Layer w0.254: U100.3 101.336,81.984 101.336,82.866 101.473,83.003 v2(101.473,83.058) ; H101.6 104.359,85.252 104.359,84.264 104.775,83.848 v2(104.775,83.058)
  Bottom Layer w0.254: v2(101.473,83.058) v2(104.775,83.058)
ESP_IO5: H101.5 U100.4 | length 6.5
  Top Layer w0.254: U100.4 99.513,81.961 100.902,83.35 100.902,83.63 v2(100.941,83.669) ; H101.5 102.616,84.455 v2(102.616,83.693)
  Bottom Layer w0.254: v2(100.941,83.669) 100.953,83.681 102.604,83.681 v2(102.616,83.693)
ESP_IO6: H101.4 U100.5 | length 4.2
  Top Layer w0.254: U100.5 98.013,84.424 H101.4
ESP_IO7: H101.3 R100.1 U100.6 | length 9.1
  Top Layer w0.254: R100.1 93.891,89.611 96.52,86.982 H101.3 96.52,81.668 U100.6
ESP_IO8: H101.2 R101.1 SW100.2 U100.7 | length 20.4
  Top Layer w0.254: v2(88.9,89.408) 89.916,88.392 R101.1 ; v2(88.9,90.564) 88.939,90.603 89.311,90.603 90.654,91.946 90.654,92.071 SW100.2@90.654,97.921 ; R101.1@90.716,88.392 93.637,85.471 H101.2 95.013,84.438 U100.7
  Bottom Layer w0.254: v2(88.9,89.408) v2(88.9,90.564)
ESP_IO9: H101.1 U100.8 | length 4.7
  Top Layer w0.254: H101.1 93.513,83.398 U100.8
ESP_IO10: H100.1 U100.10 | length 3.8
  Top Layer w0.254: U100.10 92.013,63.861 92.964,62.91 H100.1
ESP_RX: H1.4 U1.13 U100.12 | length 38.5
  Top Layer w0.254: U1.13 76.625,75.247 77.932,76.554 77.932,76.872 79.238,78.179 ; H1.4 82.296,85.09 82.296,82.677 79.238,79.619 79.238,78.179 ; U100.12 95.013,65.261 88.462,71.812 88.462,72.955 82.169,79.248 80.308,79.248 79.238,78.179
ESP_TX: H3.1 U1.12 U100.11 | length 26
  Top Layer w0.254: U1.12 77.811,73.747 H3.1 81.83,77.174 82.592,77.174 84.642,75.124 84.642,73.385 93.19,64.837 93.19,64.484 U100.11
ESP_USBD_N: H102.3 U100.13 | length 18.9
  Top Layer w0.254: U100.13 96.836,63.838 96.836,55.168 97.536,54.468 H102.3
ESP_USBD_P: H102.2 U100.14 | length 19.4
  Top Layer w0.254: U100.14 98.013,63.861 99.289,62.585 99.289,60.439 100.241,59.486 100.241,45.885 H102.2
GND: C1.2 C2.2 C3.2 C4.2 C5.2 C100.2 C101.2 C102.2 C200.2 C201.2 C301.2 C302.2 C303.2 C304.2 C305.2 D201.1 D201.2 D201.3 D300.2 FB301.1 H8.3 H102.1 H200.1 H201.1 J201.1 J300.2 J300.3 j301.A1/B12 j301.B1/A12 pad.1 Q200.2 R1.1 R204.1 R302.1 R308.1 R309.1 R310.1 R311.1 SW100.1 U1.8 U1.23 U1.47 U100.9 U100.19 U300.1 U301.2 U302.3 U302.12 U302.21 | length 5.7
  Top Layer w0.254: U302.12 41.056,71.752 41.056,72.377 41.783,73.104 U302.21 42.033,73.529 U302.3 ; D201.3 D201.2 D201.1
  other v1: 57.658,44.323 43.688,46.101 44.323,48.26 49.149,49.53 88.392,50.8 37.592,51.181 52.197,52.451 80.01,54.229 94.107,54.229 58.166,54.991 33.147,58.039 52.578,59.436 37.973,60.071 29.083,60.579 73.406,62.357 88.392,62.865 34.671,62.992 73.787,64.897 28.194,66.421 36.322,69.469 41.656,69.85 31.877,70.485 28.829,70.612 78.867,72.644 73.025,73.406 89.281,74.676 34.163,75.692 65.532,76.454 43.434,76.581 37.592,78.867 73.533,78.867 49.276,79.502 52.959,80.772 63.119,82.169 90.805,82.804 86.233,83.439 37.846,83.82 34.29,84.074 44.069,85.725 97.536,87.757 52.451,88.138 61.595,88.265 45.085,89.789 61.468,90.043 35.052,90.551 79.883,90.551 100.203,90.805 85.979,90.932 28.829,91.567 61.722,91.694 68.707,92.075 61.722,92.71 41.148,93.853 54.483,95.885 45.466,96.012 70.739,97.536 36.576,97.79 100.962,98.247 60.579,98.298 74.041,98.552 87.757,99.695 48.895,99.949 97.79,102.108 55.626,103.124 35.052,104.14 75.184,105.41 90.932,106.172 97.282,106.299
NetC200_1: C200.1 C201.1 FB200.2 H200.3 | length 14.6
  Top Layer w0.254: FB200.2 C201.1 59.687,47.155 C200.1 60.044,47.412 61.43,46.026 61.43,45.478 62.293,44.615 66.967,44.615 H200.3
NetC300_1: C300.1 L300.1 U300.2 | length 6.9
  Top Layer w0.254: L300.1 48.133,53.594 U300.2 48.133,51.255 48.737,51.859 49.429,51.859 50.546,50.742 50.546,50.673 50.889,50.33 C300.1
NetC300_2: C300.2 U300.6 | length 2.3
  Top Layer w0.254: U300.6 49.083,48.436 49.377,48.73 C300.2
NetD200_2: D200.2 J200.1 Q200.3 | length 14.5
  Top Layer w1.143: D200.2 64.099,102.159 J200.1 70.467,101.785 70.467,99.935 70.646,99.756 Q200.3
NetD201_4: D201.4 R202.1 | length 2.5
  Top Layer w0.254: R202.1 72.517,91.668 72.713,91.864 D201.4
NetD201_5: D201.5 R201.1 | length 4.5
  Top Layer w0.254: R201.1 70.523,89.7 70.866,90.043 70.866,91.129 72.701,92.964 D201.5
NetD201_6: D201.6 R200.1 | length 5.9
  Top Layer w0.254: R200.1 69.129,94.399 69.373,94.643 72.122,94.643 72.701,94.064 D201.6
NetD300_1: D300.1 R300.2 | length 2.4
  Top Layer w0.254: R300.2 49.616,60.833 D300.1@49.743,60.96
NetD301_1: D301.1 R303.1 | length 3.9
  Top Layer w0.254: R303.1 45.593,78.724 46.89,77.427 D301.1
NetD301_2: D301.2 U302.20 | length 4.2
  Top Layer w0.254: U302.20 45.692,74.029 46.89,75.227 D301.2
NetD302_1: D302.1 R304.1 | length 4.5
  Top Layer w0.254: R304.1 47.663,80.772 48.006,80.429 48.006,79.613 50.192,77.427 D302.1
NetD302_2: D302.2 U302.19 | length 7.7
  Top Layer w0.254: U302.19 48.494,73.529 50.192,75.227 D302.2
NetFB301_2: FB301.2 j301.0 | length 26.5
  Top Layer w0.254: j301.0@28.103,75.055 28.131,75.055 28.476,74.71 28.476,73.275 29.058,72.693 ; j301.0@28.103,83.695 32.283,83.695 31.783,83.695 29.439,81.351 29.439,74.789 29.058,74.408 29.058,72.693 ; FB301.2 32.283,73.381 32.283,75.055 31.758,75.055 31.037,74.334 31.037,73.098 30.469,72.53 29.221,72.53 29.058,72.693
Netj301_A5: j301.A5 R309.2 | length 5.4
  Top Layer w0.254: j301.A5 33.834,80.625 33.981,80.772 v2(34.036,80.772) ; v2(34.417,82.55) 34.455,82.512 36.106,82.512 R309.2
  Bottom Layer w0.254: v2(34.036,80.772) 34.036,80.899 34.417,81.28 v2(34.417,82.55)
Netj301_B5: j301.B5 R308.2 | length 6.1
  Top Layer w0.254: R308.2 29.845,75.402 32.045,77.602 32.835,77.602 j301.B5
NetQ200_1: Q200.1 R203.1 | length 12.9
  Top Layer w0.762: v2(67.634,97.266) 69.199,97.266 69.42,97.487 69.708,97.487 69.789,97.568 Q200.1 ; v2(69.85,95.377) 69.95,95.377 69.977,95.404 70.612,95.404 72.744,95.404 73.251,94.897 73.734,94.897 74.134,94.497 74.134,94.107 R203.1
  Bottom Layer w0.762: v2(67.634,97.266) 69.523,95.377 v2(69.85,95.377)
NetR1_2: R1.2 U1.44 | length 2.6
  Top Layer w0.254: R1.2 72.263,66.246 72.319,66.303 U1.44
NetR301_1: R301.1 R302.2 U300.4 | length 18.8
  Top Layer w0.254: R302.2 47.183,46.167 U300.4 47.359,47.954 47.359,47.286 49.839,44.806 56.123,44.806 56.286,44.969 56.286,46.141 56.072,46.355 54.926,46.355 53.213,48.068 53.213,48.349 52.87,48.692 R301.1
NetR305_1: R305.1 U302.9 | length 3.5
  Top Layer w0.254: R305.1 37.768,72.898 37.819,72.949 37.857,72.911 39.105,72.911 39.223,73.029 U302.9
PA1: H3.2 U1.11 | length 6.4
  Top Layer w0.254: U1.11 79.851,73.247 H3.2
PA4: H1.3 U1.14 | length 13.6
  Top Layer w0.254: U1.14 73.844,75.272 73.844,75.917 74.509,76.581 76.454,76.581 77.374,77.501 77.374,77.785 78.105,78.516 78.105,78.994 78.455,79.344 78.455,80.137 79.756,81.438 79.756,85.09 H1.3
PA5: H1.2 U1.15 | length 12.7
  Top Layer w0.254: U1.15 73.344,75.272 73.344,75.992 74.442,77.089 76.387,77.089 76.967,77.669 76.967,80.899 77.089,81.021 H1.2
PA8: H7.5 U1.29 | length 8.2
  Top Layer w0.254: H7.5 59.403,71.722 67.294,71.722 U1.29
PA11: H5.1 U1.32 | length 8.8
  Top Layer w0.254: H5.1 60.076,69.474 63.427,69.474 64.2,70.247 U1.32
PA12: H5.2 U1.33 | length 9.7
  Top Layer w0.254: H5.2 61.364,66.04 65.071,69.747 U1.33
PA15: H6.1 U1.38 | length 10.1
  Top Layer w0.254: H6.1 65.405,60.679 69.319,64.593 U1.38
PB2: H4.3 U1.20 | length 11.7
  Top Layer w0.254: H4.3 66.548,80.899 70.819,76.628 U1.20
PB3: H6.2 U1.39 | length 9.2
  Top Layer w0.254: H6.2 67.945,61.55 69.819,63.424 U1.39
PB4: H6.3 U1.40 | length 8.6
  Top Layer w0.254: U1.40 70.319,65.288 70.256,65.226 70.256,61.444 70.319,61.382 70.319,58.459 H6.3
PB5: H6.4 U1.41 | length 9.9
  Top Layer w0.254: U1.41 70.819,65.214 70.663,65.057 70.663,61.612 70.819,61.456 70.819,59.864 72.123,58.56 72.758,58.56 H6.4
PB6: H6.5 U1.42 | length 11.9
  Top Layer w0.254: U1.42 71.319,65.139 71.069,64.889 71.069,61.781 71.319,61.531 71.319,60.122 71.624,59.817 74.183,59.817 75.565,58.435 H6.5
PB10: H4.2 U1.21 | length 12.6
  Top Layer w0.254: H4.2 64.008,83.758 65.659,82.107 65.659,81.026 70.319,76.366 U1.21
PB11: H4.1 U1.22 | length 13.4
  Top Layer w0.254: H4.1 64.222,82.463 64.239,82.463 64.94,81.762 64.94,81.17 69.819,76.291 U1.22
PB12: H7.1 U1.25 | length 12.3
  Top Layer w0.254: H7.1 59.704,81.139 59.704,80.236 59.704,80.161 59.963,79.902 cw(c59.182,79.121) 60.287,79.106 60.287,79.032 62.09,77.128 62.253,76.965 65.572,73.747 65.677,73.747 U1.25
PB13: H7.2 U1.26 | length 10.6
  Top Layer w0.254: H7.2 65.056,73.247 U1.26
PB14: H7.3 U1.27 | length 9.7
  Top Layer w0.254: H7.3 63.016,72.747 U1.27
PB15: H7.4 U1.28 | length 8.9
  Top Layer w0.254: H7.4 60.976,72.247 U1.28
PC13: H2.5 U1.2 | length 10
  Top Layer w0.254: U1.2 75.844,68.722 76.489,68.722 77.978,67.232 77.978,65.913 80.01,63.881 80.01,62.738 80.554,62.194 81.316,62.194 H2.5
PC14: H2.4 U1.3 | length 7.7
  Top Layer w0.254: U1.3 76.803,69.247 H2.4
PC15: H2.3 U1.4 | length 6.8
  Top Layer w0.254: U1.4 77.364,69.747 80.055,67.056 H2.3
PF0: H2.2 U1.5 | length 6
  Top Layer w0.254: U1.5 77.498,70.247 77.514,70.231 77.934,70.231 77.95,70.247 78.384,70.247 79.035,69.596 H2.2
PF1: H2.1 U1.6 | length 6.9
  Top Layer w0.254: U1.6 75.823,70.743 77.72,70.743 v2(77.724,70.739) ; v2(77.724,71.755) 77.763,71.794 81.192,71.794 H2.1
  Bottom Layer w0.254: v2(77.724,70.739) v2(77.724,71.755)
PF6: H5.3 U1.35 | length 10.3
  Top Layer w0.254: H5.3 60.594,63.5 65.841,68.747 U1.35
PF7: H5.4 U1.36 | length 11.2
  Top Layer w0.254: H5.4 66.469,68.247 U1.36
R\S\T\: H8.1 U1.7 | length 36.7
  Top Layer w0.254: U1.7 80.619,71.247 80.835,71.031 82.385,71.031 83.058,70.358 83.058,60.706 93.472,50.292 93.472,45.974 H8.1
SCL_OLED: H201.3 R205.1 U1.45 | length 24.7
  Top Layer w0.254: U1.45 72.819,65.79 72.771,65.742 72.771,65 73.05,64.721 73.05,64.237 73.406,63.881 73.406,63.5 77.47,59.436 77.47,54.737 74.019,51.286 74.019,50.727 R205.1 ; R205.1@73.838,50.508 74.137,50.209 74.137,49.806 74.422,49.521 H201.3
SDA_OLED: H201.4 R206.1 U1.43 | length 26.9
  Top Layer w0.254: U1.43 71.819,65.064 71.476,64.721 71.476,61.949 73.075,60.35 75.071,60.35 76.67,58.751 76.67,55.461 72.733,51.524 72.733,50.695 72.584,50.546 R206.1 H201.4
SYS_SWCLCK: H8.4 U1.37 | length 41.7
  Top Layer w0.254: U1.37 68.819,66.303 63.5,60.984 63.5,57.531 66.929,54.102 71.27,54.102 72.032,54.864 v2(74.422,54.864) ; v2(76.962,52.324) 76.923,52.285 76.923,51.739 76.581,51.396 76.581,51.142 83.108,44.615 84.024,44.615 84.113,44.704 85.09,44.704 H8.4
  Bottom Layer w0.254: v2(74.422,54.864) v2(76.962,52.324)
SYS_SWDIO: H8.2 U1.34 | length 36.9
  Top Layer w0.254: U1.34 73.093,69.247 v2(74.23,68.111) ; v2(75.057,66.04) 75.184,66.04 91.186,50.038 H8.2
  Bottom Layer w0.254: v2(74.23,68.111) 75.057,67.283 v2(75.057,66.04)
T3C1_MOTOR_PWM: R203.2 R204.2 U1.16 | length 20.5
  Top Layer w0.254: U1.16 72.819,76.225 74.445,77.851 75.67,77.851 75.819,78 75.819,80.391 75.669,80.541 75.199,80.541 74.949,80.791 R204.2 ; R204.2@74.968,80.81 75.311,81.153 75.311,84.175 75.654,84.518 75.654,86.83 76.454,87.63 R203.2
T3C2_R_LED: H1.1 R202.2 U1.17 | length 14.6
  Top Layer w0.254: U1.17 72.319,82.987 H1.1 74.231,85.534 74.231,86.423 72.555,88.1 R202.2
T3C3_G_LED: H4.5 R201.2 U1.18 | length 13.4
  Top Layer w0.254: R201.2 70.485,86.36 H4.5 71.794,85.051 71.794,75.272 U1.18
T3C4_B_LED: H4.4 R200.2 U1.19 | length 19.2
  Top Layer w0.254: R200.2 67.437,91.567 69.088,89.916 H4.4 71.319,82.986 U1.19
USB_D_N: j301.A7 j301.B7 U301.1 | length 6.5
  Top Layer w0.254: j301.B7 32.881,80.102 33.457,80.102 33.712,79.847 33.712,79.403 33.457,79.148 32.881,79.148 j301.A7 33.457,79.125 33.528,79.125 34.417,79.125 34.417,78.986 35.179,78.986 35.179,79.129 35.994,79.944 U301.1
USB_D_P: j301.A6 j301.B6 U301.3 | length 6.2
  Top Layer w0.254: j301.A6@33.003,79.602 32.258,79.602 32.003,79.347 32.003,78.903 32.327,78.579 35.439,78.579 35.975,78.044 U301.3
USB_DETECT: R307.1 R311.2 U302.8 | length 6.9
  Top Layer w0.254: R311.2@36.741,71.247 36.563,71.425 36.563,71.913 36.327,72.149 36.206,72.149 36.043,72.312 36.043,73.484 36.219,73.66 39.491,73.66 39.599,73.552 40.21,73.552 U302.8
USB_RX: U1.31 U302.18 | length 26.6
  Top Layer w0.254: U302.18 43.356,73.006 43.732,73.006 43.78,72.958 43.855,72.958 44.062,72.751 44.062,70.545 44.211,70.396 61.76,70.396 v2(62.23,70.866) ; v2(63.754,70.739) 63.758,70.743 67.315,70.743 U1.31
  Bottom Layer w0.254: v2(62.23,70.866) 63.627,70.866 v2(63.754,70.739)
USB_TX: U1.30 U302.17 | length 27.1
  Top Layer w0.254: U302.17 43.439,72.529 43.462,72.506 43.462,71.763 43.333,71.634 43.333,70.138 43.482,69.99 62.074,69.99 63.331,71.247 U1.30
VUSB: C303.1 FB200.1 j301.A4/B9 j301.B4/A9 R307.2 U300.3 U300.5 U301.5 | length 65.4
  Top Layer w0.686: j301.A4/B9 34.518,81.775 34.788,81.506 34.788,81.153 34.788,80.13
  Top Layer w0.762: 33.706,77.038 34.112,77.038 v2(34.544,77.47) ; v2(34.788,79.672) 34.788,80.13 ; 34.788,81.153 35.479,81.153 35.593,81.039 39.658,81.039 40.302,80.395 40.302,79.493 39.859,79.05 39.175,79.05 U301.5 ; v2(37.338,66.548) 43.815,60.071 43.815,52.235 44.958,51.092 44.996,51.092 C303.1 47.127,51.003 47.183,50.947 U300.3 47.239,50.874 47.239,50.19 48.077,49.352 48.077,48.186 U300.5 48.189,48.074 48.189,47.39 50.024,45.555 FB200.1 ; v2(37.592,69.723) 38.354,70.485 38.354,71.971 38.443,72.06 38.519,72.06 39.459,71.12 v2(39.751,71.12) ; 39.859,78.938 40.748,78.049 40.748,77.674 v2(41.637,76.785)
  Bottom Layer w0.762: v2(34.544,77.47) 34.788,77.714 v2(34.788,79.672) ; v2(37.338,66.548) 37.211,66.675 37.211,69.342 v2(37.592,69.723) ; v2(39.751,71.12) 39.751,74.93 41.402,76.581 41.433,76.581 v2(41.637,76.785)
WAKE_UP: R306.1 R310.2 U302.13 | length 13
  Top Layer w0.254: R306.1 35.014,72.949 34.176,72.111 34.176,70.623 36.092,68.707 36.912,68.707 36.937,68.682 37.485,68.682 37.51,68.707 R310.2 39.235,69.029 39.6,69.029 39.763,69.193 39.763,69.33 40.054,69.621 40.682,69.621 41.51,70.449 41.51,71.706 U302.13
pads on no net: j301. j301.A8 j301.B8 U302.1 U302.2 U302.10 U302.11 U302.14 U302.15 U302.16

## Polygon pours and split planes (outlines as drawn)
GND on Bottom Layer "GND_BOT" (solid, remove dead copper, pour order 2): 37.846,43.688 25.4,56.134 25.4,109.093 98.171,109.093 101.727,105.537 105.41,101.854 105.41,43.688
GND on Top Layer "GND_TOP" (solid, remove dead copper, pour order 1): 37.846,43.688 25.4,56.134 25.4,109.093 98.171,109.093 101.727,105.537 105.41,101.854 105.41,43.688

## Other copper
Top Layer:
  rectangle net VUSB: 32.258,76.708 34.112,77.216
Multi-Layer:
  pour cut-out: 45.563,58.846 51.063,58.846 51.063,52.846 45.563,52.846

## Silkscreen, mask and mechanical layers (free items; w line width, h text height)
Top Overlay:
  drawing of 1258 lines, arcs and shapes, not listed
  text "GND" at 65.786,99.822 h0.76
  text "12V" at 72.009,99.822 h0.76
  text "GND" at 77.343,99.822 h0.76
  text "ANEMO" at 81.407,99.822 h0.76
  text "BOOT" at 91.694,96.393 h0.76
  text "POWER JACK / 12V" at 28.448,94.996 h0.76
  text "9" at 90.932,86.864 h0.76
  text "8" at 93.599,86.864 h0.76
  text "7" at 96.235,86.864 h0.76
  text "6" at 98.679,86.864 h0.76
  text "5" at 101.219,86.864 h0.76
  text "4" at 103.632,86.864 h0.76
  text "USBC" at 29.464,84.709 h0.76
  text "IO PINS" at 88.138,84.137 h0.76 r270
  text "PB11" at 60.96,83.883 h0.76 r270
  text "PB10" at 63.548,83.883 h0.76 r270
  text "PB2" at 66.135,83.883 h0.76 r270
  text "BLUE" at 68.723,83.883 h0.76 r270
  text "GREEN" at 71.311,83.883 h0.76 r270
  text "RED" at 73.898,83.883 h0.76 r270
  text "PA5" at 76.486,83.883 h0.76 r270
  text "PA4" at 79.073,83.883 h0.76 r270
  text "ESPRX" at 81.534,83.883 h0.76 r270
  text "PB12" at 54.864,81.153 h0.76
  text "PB13" at 54.864,78.486 h0.76
  text "ESPTX" at 83.185,76.962 h0.76
  text "PB14" at 54.864,75.819 h0.76
  text "PA1" at 83.185,74.295 h0.76
  text "PB15" at 54.864,73.279 h0.76
  text "UART" at 47.117,72.771 h0.76
  text "PF1" at 83.185,71.628 h0.76
  text "PA8" at 55.499,70.866 h0.76
  text "PF0" at 83.185,68.961 h0.76
  text "PA11" at 55.118,68.072 h0.76
  text "PC15" at 83.185,66.548 h0.76
  text "PA12" at 54.864,65.278 h0.76
  text "PC14" at 83.185,64.008 h0.76
  text "POWER" at 49.149,63.5 h0.76
  text "PF6" at 55.499,62.738 h0.76
  text "PC13" at 83.185,61.468 h0.76
  text "PF7" at 55.499,60.198 h0.76
  text "IO PINS" at 89.535,59.626 h0.76 r270
  text "10" at 92.329,58.293 h0.76
  text "3" at 95.123,58.293 h0.76
  text "2" at 97.663,58.293 h0.76
  text "1" at 100.33,58.293 h0.76
  text "0" at 102.743,58.293 h0.76
  text "PA15" at 64.897,56.642 h0.76 r270
  text "PB3" at 67.564,56.642 h0.76 r270
  text "PB4" at 70.104,56.642 h0.76 r270
  text "PB5" at 72.644,56.642 h0.76 r270
  text "PB6" at 75.184,56.642 h0.76 r270
  text "DCDC" at 40.894,55.499 h0.76
  text "MCU PROGRAMMER" at 84.963,51.943 h0.76
  text "SWCLCK" at 85.471,51.689 h0.76 r270
  text "SWDIO" at 90.678,50.8 h0.76 r270
  text "DHT11" at 64.897,50.609 h0.76 r270
  text "OLED" at 76.2,50.292 h0.76
  text "GND" at 62.357,49.466 h0.76 r270
  text "SDA" at 71.374,49.466 h0.76 r270
  text "SCL" at 74.01,49.466 h0.76 r270
  text "3V3" at 76.327,49.466 h0.76 r270
  text "GND" at 78.867,49.466 h0.76 r270
  text "3V3" at 82.931,49.466 h0.76 r270
  text "GND" at 88.011,49.466 h0.76 r270
  text "RST" at 92.837,49.466 h0.76 r270
  text "GND" at 101.981,49.466 h0.76 r270
  text "ESP USBD" at 98.806,49.276 h0.76
  text "5V" at 67.564,48.832 h0.76 r270
  text "D-" at 96.901,48.832 h0.76 r270
  text "D+" at 99.695,48.832 h0.76 r270
Board Shape:
  the board outline again, w0.254

## Text inside footprints (layer, text, board x,y; h text height)
D300: Top Overlay "+" at 48.26,60.198 h0.89
D301: Top Overlay "+" at 46.304,79.197 h0.89 r270
D302: Top Overlay "+" at 49.606,79.197 h0.89 r270